# Altium PCB PCB1.PcbDoc
Units mm, origin at the board's own origin, x right, y up, seen from the top; angles counter-clockwise.
Board outline 66.19 x 22.63 mm, 2 copper layers (Top Layer, Bottom Layer); 5 components, 4 nets, 16 pads, 0 vias.
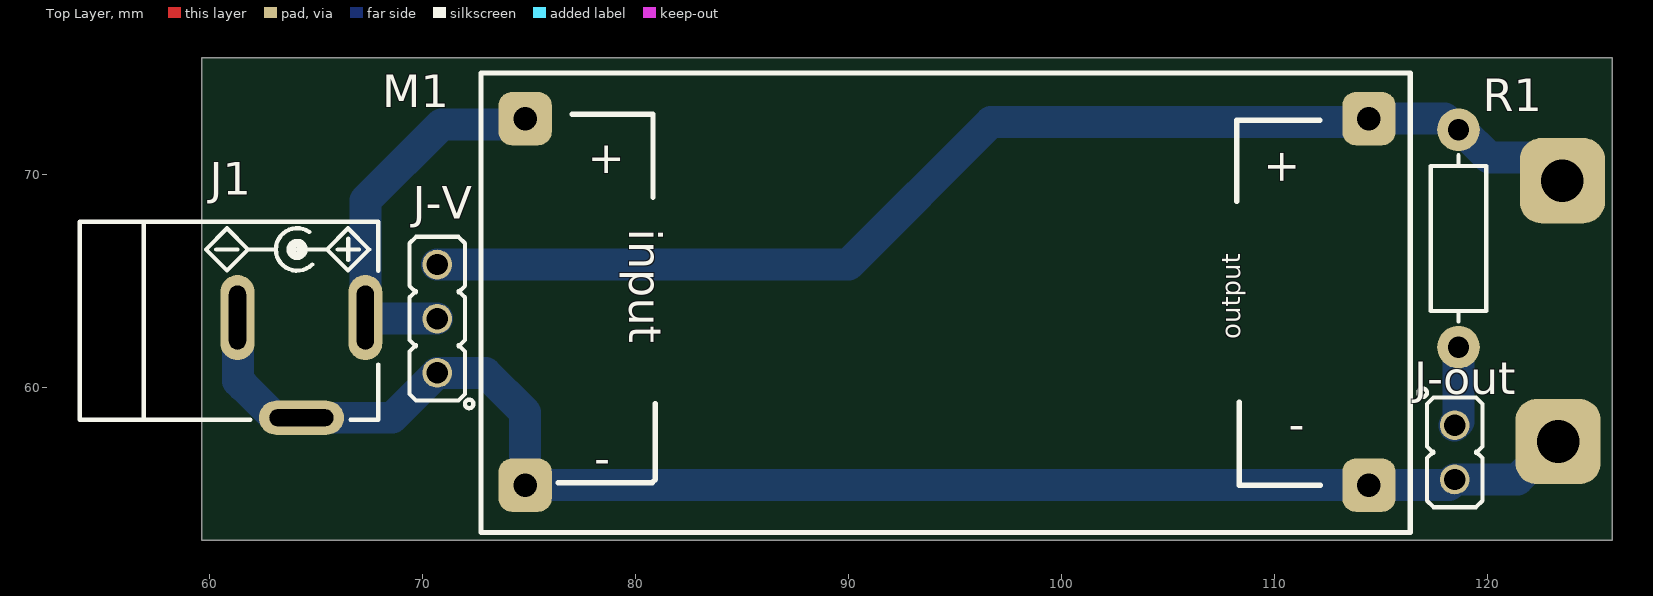
[diagram p0: Top Layer view]
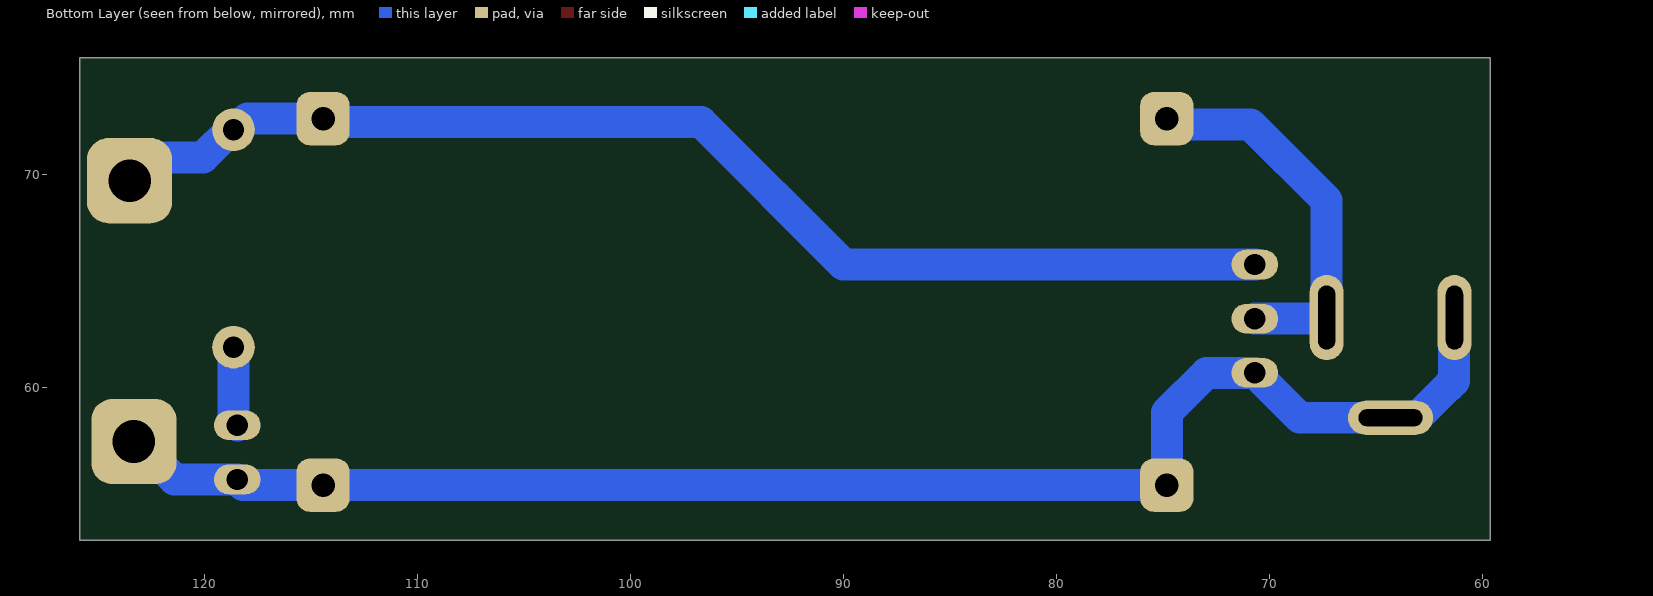
[diagram p1: Bottom Layer view, seen from below]

## Layer stack, top to bottom
Top Solder: solder mask 0.0102, Solder Resist, Dk 3.5
Top Layer: signal copper 0.0356
Dielectric 1: dielectric 0.32, FR-4, Dk 4.8
Bottom Layer: signal copper 0.0356
Bottom Solder: solder mask 0.0102, Solder Resist, Dk 3.5

## Board outline
59.639,52.857 125.832,52.857 125.832,75.489 59.639,75.489

## Design rules (kind name [scope] priority, off if disabled: settings)
Clearance [All] p1: gap=0.3 ignorepadtopadclearanceinfootprint=FALSE except(0: Arc-Hole Track-Hole SMDPad-Hole THPad-Hole Via-Hole Fill-Hole Poly-Hole Region-Hole Text-Hole)
PolygonConnect [All] p1: connectstyle=Relief reliefconductorwidth=0.254 reliefentries=4 polygonreliefangle="90 Angle" airgapwidth=0.254
RoutingVias [All] p1: holewidth=0.711 width=1.27 viastyle="Through Hole" minholewidth=0.711 minwidth=1.27 maxholewidth=0.711 maxwidth=1.27
SolderMaskExpansion [All] p1: expansion=0.102 istentingtop=FALSE
Width [All] p1: maxlimit=1.5 minlimit=0.5 preferedwidth=1 minimp=50.000000 maximp=50.000000 favimp=50.000000
30 further rules are at their usual default settings.

## Components (designator, comment, footprint, x,y, rotation, side; value= is the part's Value field where it differs from the comment)
J1 "DC_POWER_JACK" JAC_PWR2 67.316,63.297 r90 top
J-out "HDRM2" HDR_M_1X2 118.44,56.972 r270 top
J-V "HDRM3" HDR_M_1X3 70.688,63.246 r90 top
M1 "LM2596" dc-dc-module 94.615,64.033 r0 top
R1 "1.5K" R025W_AX04 118.618,67.011 r90 top

## Footprints (in the part's own frame and the unit in brackets; to place one, negate y for a bottom-side part, rotate by r counter-clockwise, add the part's x,y. Pads: shape width x height; smd on the part's side, far side on the other; paste and mask are expansions set on the pad)
dc-dc-module [mm] "LM2596, power madoule"
  rrect50% 2.5x2.5 hole 1.1: 1(-19.8,8.6) 2(-19.8,-8.6) 3(19.8,-8.6) 4(19.8,8.6)
  silkscreen extent -21.87,-10.82 21.74,10.74, body extent -21.65,-10.65 21.65,10.65, height 13.45
HDR_M_1X2 [mm] "Connector; Header; 2 Position"
  round 1.4 / inner round 1.4 / far side oval 1.4x2.2 hole 1 mask+0.1: 1(-1.27,0) 2(1.27,0)
  silkscreen extent -3,-1.7 2.57,1.3, body extent -2.54,-1.25 2.44,1.25, height 8.72
HDR_M_1X3 [mm] "Connector; Header; 3 Position"
  round 1.4 / inner round 1.4 / far side oval 1.4x2.2 hole 1 mask+0.1: 1(-2.54,0) 2(0,0) 3(2.54,0)
  silkscreen extent -4.2,-1.7 3.84,1.3, body extent -3.78,-1.27 3.84,1.27, height 8.54
JAC_PWR2 [mm] "DC POWER JACK, Power Jack KLDX-0202"
  oval 4x1.6 hole 0.8 slot 3 at 0 deg: 1(0,0) 2(0,6)
  oval 1.6x4 hole 0.8 slot 3 at 90 deg: 3(-4.7,3)
  silkscreen extent -4.8,-0.6 4.5,13.4, body extent -4.9,-0.65 4.5,13.85, height 10.8
R025W_AX04 [mm] "RESISTOR 1/4 WATT, AXIAL0.4"
  round 2 hole 1: 1(-5.1,0) 2(5.1,0)
  silkscreen extent -3.9,-1.3 3.9,1.3, body extent -5.38,-1.28 5.38,1.28, height 2.6

## Part data
J1: library part CONN_PWR_JACKR2, "CONN, PWR JACK DC, PLUG DIAM 2.0MM RA THD", MANF="CUI STACK", MANF_P#="PJ-202A, PJ-002AH, PJ-102AH, KLDX-0202"
J-out: library part HDR_M_1X2, "CONN, HEADER, Male, pitch: 2.54mm, 2POS"
J-V: library part HDR_M_1X3, "CONN, HEADER, Male, pitch: 2.54mm, 3POS"
M1: library part MADOULE-DC-DC, "step-down voltage"
R1: library part RES_THD, "RESISTOR, THD", ASSEMBLY=ASSEMBLY, DESC=DESCRIPTION, DIST#=MOUSER, MANF="KOA SPEER", MANF_P#=RK73H1ETTP4701F, PARAM=0.063W, PARAM2=1%, PRICE="100= 0.5$"

## Free pads (board coordinates)
  rrect50% 4x4 hole 2: GND(123.292,57.48) out+(123.495,69.723)

## Nets (pads, with @x,y where several pads share a name; then routed paths per layer and width w, separated by ;. In a path a pad name is that pad's centre, name@x,y a point inside that pad or via, vN(x,y) a via of type N, cw(c..) or ccw(c..) an arc to the next point about the centre after c; other vN are vias at no path point)
GND: J1.2 J1.3 J-out.2 J-V.1 M1.2 M1.3 pad.GND | length 71.5
  Bottom Layer w1.5: J1.2 61.335,63.278 61.335,60.331 61.57,60.096 61.589,60.096 63.089,58.597 J1.3 68.579,58.597 J-V.1 72.949,60.706 74.815,58.84 M1.2 M1.3 118.171,55.433 J-out.2 121.378,55.702 123.156,57.48 pad.GND
NetJ-out_1: J-out.1 R1.1 | length 3.7
  Bottom Layer w1.5: J-out.1 118.618,58.42 R1.1
VCC: J1.1 J-V.2 M1.1 | length 18
  Bottom Layer w1.5: J-V.2 67.362,63.246 67.316,63.292 J1.1 67.316,68.789 70.891,72.365 74.546,72.365 M1.1
Vout: J-V.3 M1.4 pad.out+ R1.2 | length 56.8
  Bottom Layer w1.5: J-V.3 89.992,65.786 96.672,72.466 114.248,72.466 M1.4 117.96,72.633 118.483,72.111 R1.2 118.753,72.111 120.045,70.819 122.399,70.819 pad.out+

## Text inside footprints (layer, text, board x,y; h text height)
M1: Top Overlay "output" at 108.67,62.281 h1.52 r90; Top Overlay "-" at 111.404,58.699 h1.52 r180; Top Overlay "+" at 110.973,69.494 h1.52 r90; Top Overlay "+" at 77.749,70.079 h1.52; Top Overlay "-" at 78.054,55.956 h1.52; Top Overlay "input" at 79.705,67.462 h1.52 r270